# EAGLE board untitled (EAGLE 8.6.3)
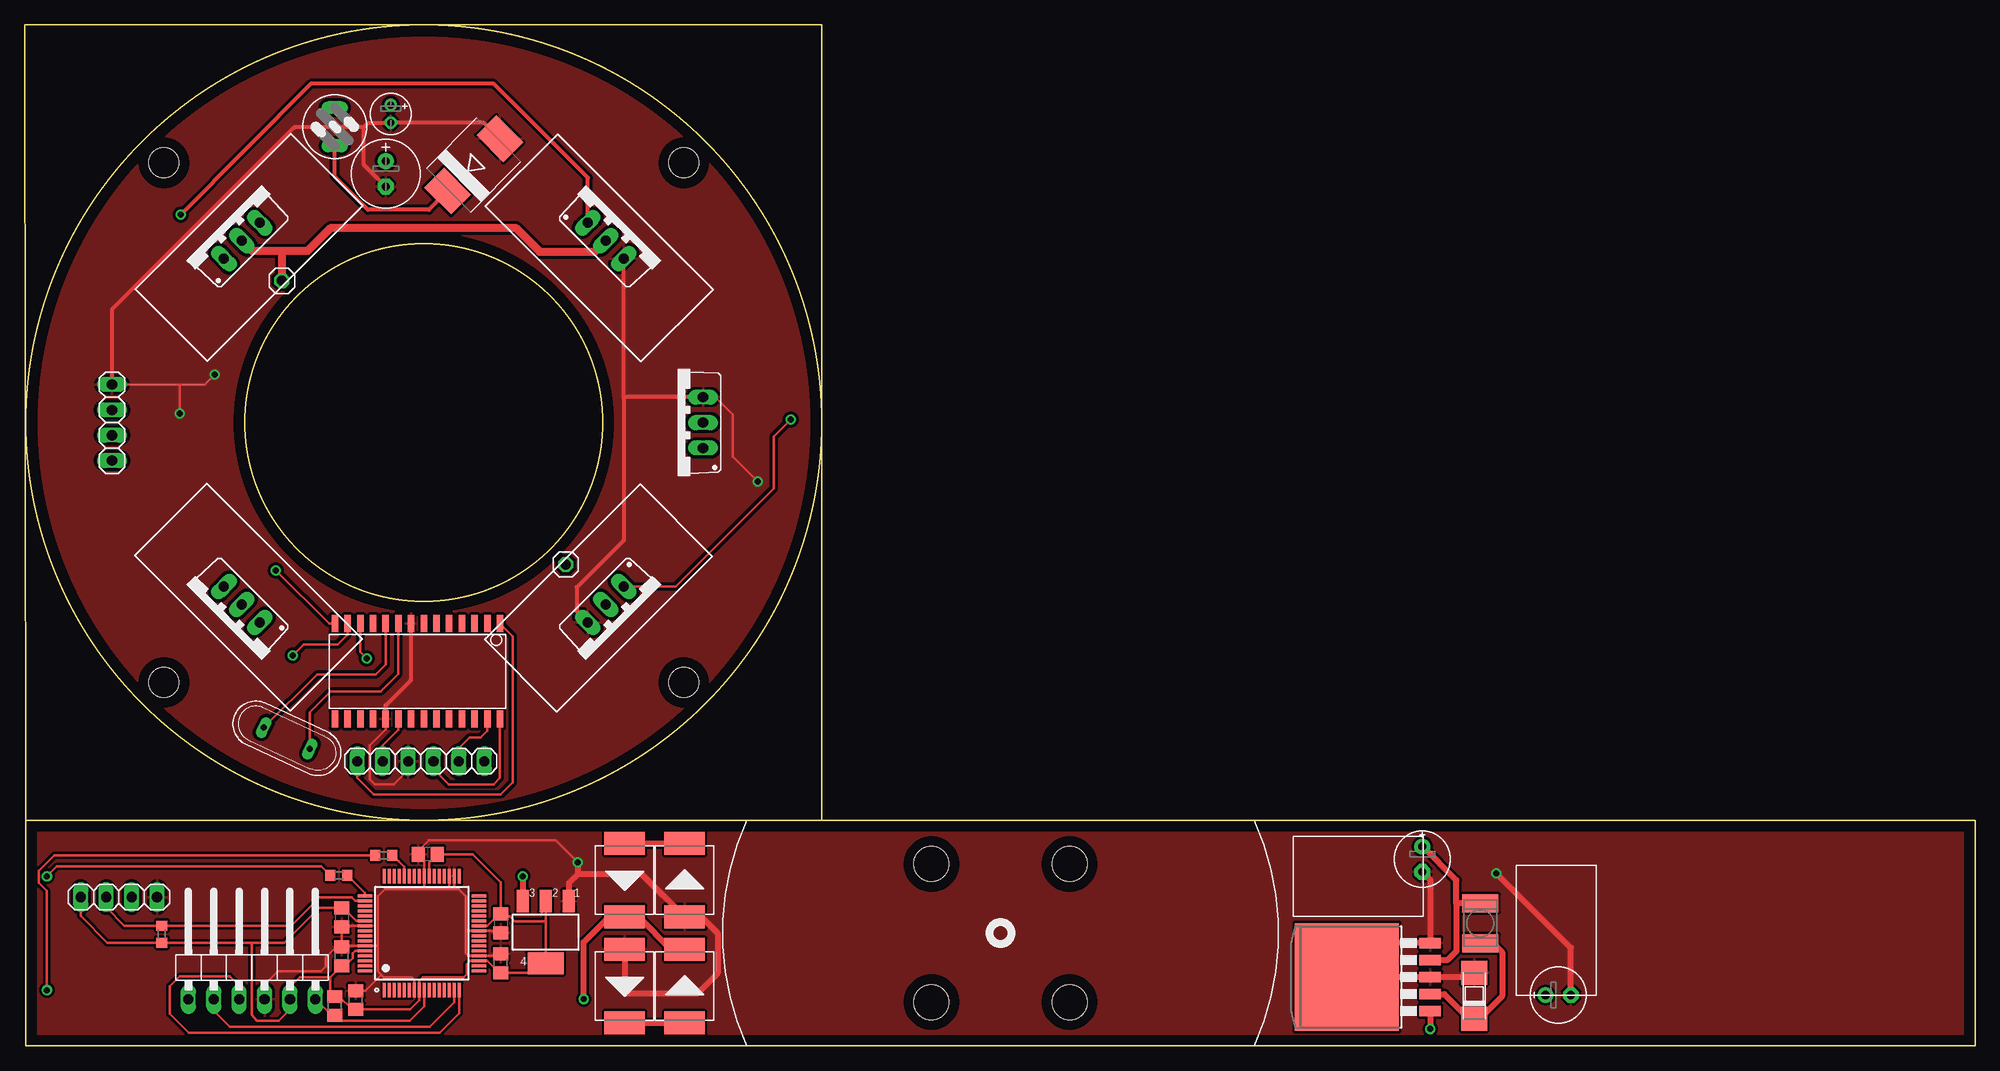
[diagram p0: board, top side]
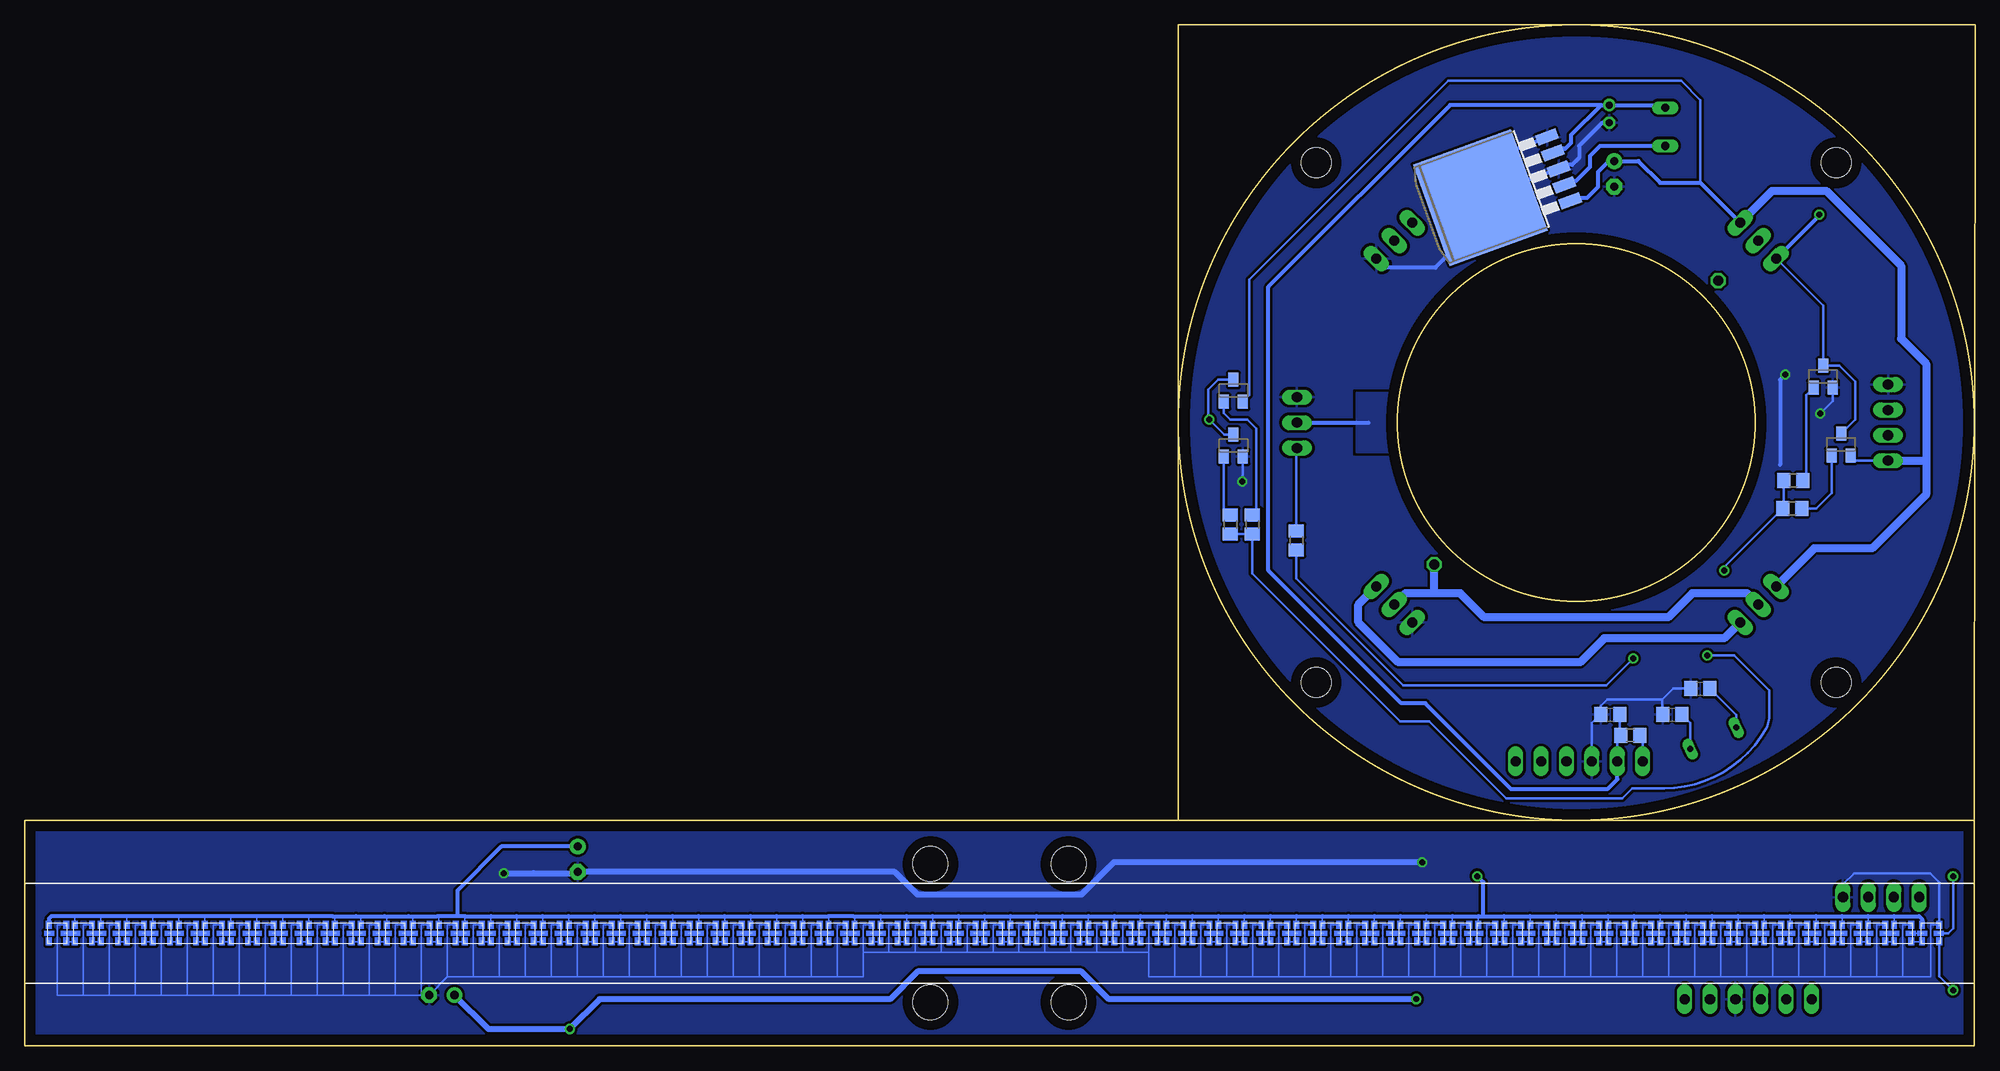
[diagram p1: board, bottom side, seen from below]

Size 195.1 x 102.2 mm. Coordinates in mm from the lower left corner, seen from the top.
Outline: 0.1,22.6 79.7,22.6
Outline: 79.7,22.6 195.1,22.6 195.1,0 0.1,0 0.1,22.6
Outline: 0.1,22.6 0,102.2 79.7,102.2 79.7,22.6
Outline: circle at 39.9,62.4 radius 17.9
Outline: circle at 39.9,62.4 radius 39.79
Copper layers (1*16): Top 0.035mm / dielectric 1.5mm / Bottom 0.035mm
Design rules "default": minimum track width 6mil, minimum drill 0.35mm, track to track 6mil, track to pad 6mil, pad to pad 6mil, via to via 6mil, smd to smd 6mil, copper to edge 40mil, drill to drill 6mil, minimum pad ring 10mil, minimum via ring 8mil, stop-mask expansion 4mil, vias tented up to drill 0mil, thermal gap 10mil
Holes 3.51 mm at 104.51,18.21 90.69,4.39 104.51,4.39 90.69,18.21
Holes 3 mm at 65.9,88.4 13.9,88.4 13.9,36.4 65.9,36.4
Holes 35.8 mm at 39.9,62.4

## Footprints (pad centres in the part's own frame; a part is rotated, then mirrored left to right if it is on the bottom)
E2,5-6E = drill 0.813 pad 1.575: + -1.27,0 | drill 0.813 pad 1.575 octagon: - 1.27,0
C0805 = smd 1.3 x 1.5: 1 -0.95,0; 2 0.95,0
E2,5-7 = drill 0.813 pad 1.6: + -1.27,0 | drill 0.813 pad 1.6 octagon: - 1.27,0
E1,8-4 = drill 0.711 pad 1.168: + -0.889,0 | drill 0.711 pad 1.168 octagon: - 0.889,0
SOD106A = smd 2.4 x 2.6: A 2.3,0; K -2.3,0
DO-214AB = smd 2.286 x 4.064: 1 -3.683,0; 2 3.683,0
DIODE_SMC = smd 2.8 x 3.8: A 3.7,0; C -3.7,0
TO263-5 = smd 1.067 x 2.159: 1 -3.404,-5.791; 2 -1.702,-5.791; 3 0,-5.791; 4 1.702,-5.791; 5 3.404,-5.791 | smd 10.8 x 10.41: 6 0,2.54
SOT223 = smd 1.219 x 2.235: 1 -2.311,-3.099; 2 0,-3.099; 3 2.311,-3.099 | smd 3.6 x 2.2: 4 0,3.099
SO28W = smd 0.65 x 1.7: 1 -7.62,-4.78; 2 -6.35,-4.78; 3 -5.08,-4.78; 4 -3.81,-4.78; 5 -2.54,-4.78; 6 -1.27,-4.78; 7 0,-4.78; 8 1.27,-4.78; 9 2.54,-4.78; 10 3.81,-4.78; 11 5.08,-4.78; 12 6.35,-4.78; 13 7.62,-4.78; 14 8.89,-4.78; 15 8.89,4.78; 16 7.62,4.78; 17 6.35,4.78; 18 5.08,4.78; 19 3.81,4.78; 20 2.54,4.78; 21 1.27,4.78; 22 0,4.78; 23 -1.27,4.78; 24 -2.54,4.78; 25 -3.81,4.78; 26 -5.08,4.78; 27 -6.35,4.78; 28 -7.62,4.78
1X06/90 = drill 1.016 long: 1 -6.35,-3.81; 2 -3.81,-3.81; 3 -1.27,-3.81; 4 1.27,-3.81; 5 3.81,-3.81; 6 6.35,-3.81
1X04 = drill 1.016 long: 1 -3.81,0; 2 -1.27,0; 3 1.27,0; 4 3.81,0
1X06 = drill 1.016 long: 1 -6.35,0; 2 -3.81,0; 3 -1.27,0; 4 1.27,0; 5 3.81,0; 6 6.35,0
1X01 = drill 1.016 octagon: 1 0,0
82114R = drill 0.813 long: 1 0,1.905; 2 0,-1.905
L4532P = smd 1.8 x 3.6: 1 -2,0; 2 2,0
SOT23 = smd 1 x 1.4: 1 -0.95,-1.1; 2 0.95,-1.1; 3 0,1.1
TO220BV = drill 1.016 long: D 0,-2.54; G -2.54,-2.54; S 2.54,-2.54
QS = drill 0.61 long: 1 -2.54,0; 2 2.54,0
R0805 = smd 1.3 x 1.5: 1 -0.95,0; 2 0.95,0
R0603 = smd 1 x 1.1: 1 -0.85,0; 2 0.85,0
TO220BV' = drill 1.016 long: 1 -2.54,-2.54; 2 0,-2.54; 3 2.54,-2.54
QFP50P1200X1200X120-64N = smd 1.45 x 0.3: 1 -5.7,3.75; 2 -5.7,3.25; 3 -5.7,2.75; 4 -5.7,2.25; 5 -5.7,1.75; 6 -5.7,1.25; 7 -5.7,0.75; 8 -5.7,0.25; 9 -5.7,-0.25; 10 -5.7,-0.75; 11 -5.7,-1.25; 12 -5.7,-1.75; 13 -5.7,-2.25; 14 -5.7,-2.75; 15 -5.7,-3.25; 16 -5.7,-3.75; 33 5.7,-3.75; 34 5.7,-3.25; 35 5.7,-2.75; 36 5.7,-2.25; 37 5.7,-1.75; 38 5.7,-1.25; 39 5.7,-0.75; 40 5.7,-0.25; 41 5.7,0.25; 42 5.7,0.75; 43 5.7,1.25; 44 5.7,1.75; 45 5.7,2.25; 46 5.7,2.75; 47 5.7,3.25; 48 5.7,3.75 | smd 0.3 x 1.45: 17 -3.75,-5.7; 18 -3.25,-5.7; 19 -2.75,-5.7; 20 -2.25,-5.7; 21 -1.75,-5.7; 22 -1.25,-5.7; 23 -0.75,-5.7; 24 -0.25,-5.7; 25 0.25,-5.7; 26 0.75,-5.7; 27 1.25,-5.7; 28 1.75,-5.7; 29 2.25,-5.7; 30 2.75,-5.7; 31 3.25,-5.7; 32 3.75,-5.7; 49 3.75,5.7; 50 3.25,5.7; 51 2.75,5.7; 52 2.25,5.7; 53 1.75,5.7; 54 1.25,5.7; 55 0.75,5.7; 56 0.25,5.7; 57 -0.25,5.7; 58 -0.75,5.7; 59 -1.25,5.7; 60 -1.75,5.7; 61 -2.25,5.7; 62 -2.75,5.7; 63 -3.25,5.7; 64 -3.75,5.7
2020LED = smd 0.305 x 0.152: CLKI -0.85,0; CLKO 0.85,0 | smd 0.152 x 0.305: GND -0.85,-0.85; SDI -0.85,0.85; SDO 0.85,0.85; VCC 0.85,-0.85

## Placement (x,y rotation side)
C1  [E2,5-6E]  139.8,18.7 270 top
C2  [C0805]  40.3,19.2 180 top
C3  [E2,5-6E]  153.4,5.1 0 top
C4  [C0805]  31.7,12.9 270 top
C5  [C0805]  47.6,12.3 270 top
C6  [C0805]  33.1,4.6 90 top
C7  [C0805]  47.6,8.3 90 top
C8  [C0805]  31.7,9 90 top
C9  [C0805]  36.5,33.2 0 bottom
C10  [C0805]  27.5,35.8 0 bottom
C11  [C0805]  30.3,33.2 0 bottom
C12  [E2,5-7]  36.1,87.3 270 top
C13  [E1,8-4]  36.6,93.3 270 top
D1  [SOD106A]  144.99,5.04 90 top
D2  SMD-DIODE-SCHOTTKY-40V-3A(DO-214AB)  [DO-214AB]  66,6 90 top
D3  SMD-DIODE-SCHOTTKY-40V-3A(DO-214AB)  [DO-214AB]  60,16.6 270 top
D4  SMD-DIODE-SCHOTTKY-40V-3A(DO-214AB)  [DO-214AB]  66,16.6 90 top
D5  SMD-DIODE-SCHOTTKY-40V-3A(DO-214AB)  [DO-214AB]  60,6 270 top
D6  [DIODE_SMC]  44.9,88.2 45 top
IC1  LM2576S  [TO263-5]  134.8,6.9 90 top
IC2  [SOT223]  52.1,11.4 180 top
IC3  PIC16F876SO  [SO28W]  39.9,37.5 180 top
IC4  LM2576S  [TO263-5]  47.1,85.8 110 bottom
JP1  [1X06/90]  22.7,8.5 0 top
JP2  [1X04]  9.4,14.9 0 top
JP3  [1X04]  8.7,62.4 90 top
JP4  [1X06]  39.6,28.5 0 top
JP5  [1X01]  25.7,76.6 0 top
JP6  [1X01]  54.1,48.2 0 top
L1  82114R  [82114R]  31,92 180 top
L2  [L4532P]  145.6,12.3 90 top
Q1  [SOT23]  15.2,67 0 bottom
Q2  [SOT23]  74.2,60.1 0 bottom
Q3  [SOT23]  13.4,60.2 0 bottom
Q4  [SOT23]  74.2,65.6 0 bottom
Q5  IRF540  [TO220BV]  59.9,82.4 315 top
Q6  IRF540  [TO220BV]  59.9,42.4 225 top
Q7  [TO220BV]  19.9,82.4 45 top
Q8  [QS]  26.2,30.8 335 top
Q9  [TO220BV]  19.9,42.4 135 top
R1  [R0805]  31,4 270 top
R2  [R0603]  13.7,11.2 90 top
R3  [R0805]  18.2,56.6 0 bottom
R4  [R0603]  35.9,19.1 180 top
R5  [R0603]  31.4,17.1 180 top
R6  [R0805]  18.3,53.8 0 bottom
R7  [R0805]  72.3,52.2 90 bottom
R8  [R0805]  74.5,52.2 90 bottom
R9  [R0805]  34.5,31.1 180 bottom
R10  [R0805]  67.9,50.6 90 bottom
T2  2SC1306  [TO220BV']  65.3,62.4 90 top
U1  PIC32MZ2048EFH064-I/PT  [QFP50P1200X1200X120-64N]  39.7,11.3 90 top
U$1  2020LED  [2020LED]  7.25,11.3 180 bottom
U$2  2020LED  [2020LED]  4.45,11.3 180 bottom
U$3  2020LED  [2020LED]  9.85,11.3 180 bottom
U$4  2020LED  [2020LED]  12.45,11.3 180 bottom
U$5  2020LED  [2020LED]  15.05,11.3 180 bottom
U$6  2020LED  [2020LED]  17.65,11.3 180 bottom
U$7  2020LED  [2020LED]  20.25,11.3 180 bottom
U$8  2020LED  [2020LED]  22.85,11.3 180 bottom
U$9  2020LED  [2020LED]  25.45,11.3 180 bottom
U$10  2020LED  [2020LED]  28.05,11.3 180 bottom
U$11  2020LED  [2020LED]  30.65,11.3 180 bottom
U$12  2020LED  [2020LED]  33.25,11.3 180 bottom
U$13  2020LED  [2020LED]  35.85,11.3 180 bottom
U$14  2020LED  [2020LED]  38.45,11.3 180 bottom
U$15  2020LED  [2020LED]  41.05,11.3 180 bottom
U$16  2020LED  [2020LED]  43.65,11.3 180 bottom
U$17  2020LED  [2020LED]  46.25,11.3 180 bottom
U$18  2020LED  [2020LED]  48.85,11.3 180 bottom
U$19  2020LED  [2020LED]  51.45,11.3 180 bottom
U$20  2020LED  [2020LED]  54.05,11.3 180 bottom
U$21  2020LED  [2020LED]  56.65,11.3 180 bottom
U$22  2020LED  [2020LED]  59.25,11.3 180 bottom
U$23  2020LED  [2020LED]  61.85,11.3 180 bottom
U$24  2020LED  [2020LED]  64.45,11.3 180 bottom
U$25  2020LED  [2020LED]  67.05,11.3 180 bottom
U$26  2020LED  [2020LED]  69.65,11.3 180 bottom
U$27  2020LED  [2020LED]  72.25,11.3 180 bottom
U$28  2020LED  [2020LED]  74.85,11.3 180 bottom
U$29  2020LED  [2020LED]  77.45,11.3 180 bottom
U$30  2020LED  [2020LED]  80.05,11.3 180 bottom
U$31  2020LED  [2020LED]  82.65,11.3 180 bottom
U$32  2020LED  [2020LED]  85.25,11.3 180 bottom
U$33  2020LED  [2020LED]  87.85,11.3 180 bottom
U$34  2020LED  [2020LED]  90.45,11.3 180 bottom
U$35  2020LED  [2020LED]  93.05,11.3 180 bottom
U$36  2020LED  [2020LED]  95.65,11.3 180 bottom
U$37  2020LED  [2020LED]  98.25,11.3 180 bottom
U$38  2020LED  [2020LED]  100.85,11.3 180 bottom
U$39  2020LED  [2020LED]  103.45,11.3 180 bottom
U$40  2020LED  [2020LED]  106.05,11.3 180 bottom
U$41  2020LED  [2020LED]  108.65,11.3 180 bottom
U$42  2020LED  [2020LED]  111.25,11.3 180 bottom
U$43  2020LED  [2020LED]  113.85,11.3 180 bottom
U$44  2020LED  [2020LED]  116.45,11.3 180 bottom
U$45  2020LED  [2020LED]  119.05,11.3 180 bottom
U$46  2020LED  [2020LED]  121.65,11.3 180 bottom
U$47  2020LED  [2020LED]  124.25,11.3 180 bottom
U$48  2020LED  [2020LED]  126.85,11.3 180 bottom
U$49  2020LED  [2020LED]  129.45,11.3 180 bottom
U$50  2020LED  [2020LED]  132.05,11.3 180 bottom
U$51  2020LED  [2020LED]  134.65,11.3 180 bottom
U$52  2020LED  [2020LED]  137.25,11.3 180 bottom
U$53  2020LED  [2020LED]  139.85,11.3 180 bottom
U$54  2020LED  [2020LED]  142.45,11.3 180 bottom
U$55  2020LED  [2020LED]  145.05,11.3 180 bottom
U$56  2020LED  [2020LED]  147.65,11.3 180 bottom
U$57  2020LED  [2020LED]  150.25,11.3 180 bottom
U$58  2020LED  [2020LED]  152.85,11.3 180 bottom
U$59  2020LED  [2020LED]  155.45,11.3 180 bottom
U$60  2020LED  [2020LED]  158.05,11.3 180 bottom
U$61  2020LED  [2020LED]  160.65,11.3 180 bottom
U$62  2020LED  [2020LED]  163.25,11.3 180 bottom
U$63  2020LED  [2020LED]  165.85,11.3 180 bottom
U$64  2020LED  [2020LED]  168.45,11.3 180 bottom
U$65  2020LED  [2020LED]  171.05,11.3 180 bottom
U$66  2020LED  [2020LED]  173.65,11.3 180 bottom
U$67  2020LED  [2020LED]  176.25,11.3 180 bottom
U$68  2020LED  [2020LED]  178.85,11.3 180 bottom
U$69  2020LED  [2020LED]  181.45,11.3 180 bottom
U$70  2020LED  [2020LED]  184.05,11.3 180 bottom
U$71  2020LED  [2020LED]  186.65,11.3 180 bottom
U$72  2020LED  [2020LED]  189.25,11.3 180 bottom
U$73  2020LED  [2020LED]  191.85,11.3 180 bottom

## Library data of the parts
C1-C11 L2 R1-R10 = resistor
C12 C13 = rcl; SPICEPREFIX: C
D1 = telefunken; MPN: BYS10/45; OC_FARNELL: 9549188; OC_NEWARK: 96K7236
D2-D5 = SMD-DIODE-SCHOTTKY-40V-3A_DO-214AB_; AVAILABILITY: Good; DESCRIPTION: Rectifier%2C Schottky%3B DO-214AB%3B 3.0A IF%3B 0.75V%3B 40V%3B 100A IFRM%3B 10000V/us%3B 1000pF; MF: Vishay; MP: SS34-E3/57T; PACKAGE: DO-214 Vishay; PRICE: 0.24 USD
D6 = eagle-ltspice; SPICEMODEL: diode; SPICEPREFIX: D
IC1 IC2 IC4 = lm2576
IC3 = microchip; MF: MICROCHIP; MPN: PIC16F876-20/SO; OC_FARNELL: 9761268; OC_NEWARK: 12C1950
JP1-JP6 = pinhead
L1 = inductors; SPICEPREFIX: L
Q1-Q4 = semicon-smd-ipc
Q5-Q7 Q9 = transistor-power
Q8 = special
T2 = transistor
U1 = PIC32MZ2048EFH064-I_PT; AVAILABILITY: Good; DESCRIPTION: PIC32MZ Series 2 MB Flash 512 kB RAM 200 MHz 32-Bit Microcontroller - TQFP-64; MF: Microchip; MP: PIC32MZ2048EFH064-I/PT; PACKAGE: TQFP-64 Microchip; PRICE: 11.29 USD
U$1-U$73 = APA2020

## Nets
+3V3: C2.1 C4.1 C5.1 C6.1 C7.1 C8.1 IC2.2 JP1.5 JP2.1 R1.1 R2.1 U1.8 U1.19 U1.26 U1.39 U1.54 U1.60
+5V: C1.+ IC1.4 IC2.3 L2.2 U$1.VCC U$2.VCC U$3.VCC U$4.VCC U$5.VCC U$6.VCC U$7.VCC U$8.VCC U$9.VCC U$10.VCC U$11.VCC U$12.VCC U$13.VCC U$14.VCC U$15.VCC U$16.VCC U$17.VCC U$18.VCC U$19.VCC U$20.VCC U$21.VCC U$22.VCC U$23.VCC U$24.VCC U$25.VCC U$26.VCC U$27.VCC U$28.VCC U$29.VCC U$30.VCC U$31.VCC U$32.VCC U$33.VCC U$34.VCC U$35.VCC U$36.VCC U$37.VCC U$38.VCC U$39.VCC U$40.VCC U$41.VCC U$42.VCC U$43.VCC U$44.VCC U$45.VCC U$46.VCC U$47.VCC U$48.VCC U$49.VCC U$50.VCC U$51.VCC U$52.VCC U$53.VCC U$54.VCC U$55.VCC U$56.VCC U$57.VCC U$58.VCC U$59.VCC U$60.VCC U$61.VCC U$62.VCC U$63.VCC U$64.VCC U$65.VCC U$66.VCC U$67.VCC U$68.VCC U$69.VCC U$70.VCC U$71.VCC U$72.VCC U$73.VCC
+5V1: C9.2 C13.+ IC3.20 IC4.4 JP4.2 L1.2 R9.2
+12V: C12.+ IC4.1 JP3.1 Q3.2 Q4.2 Q7.S Q9.S
+15V: C3.+ D2.2 D3.2 IC1.1
GND: C1.- C2.2 C3.- C4.2 C5.2 C6.2 C7.2 C8.2 D1.A D4.1 D5.1 IC1.3 IC1.5 IC2.1 JP1.4 JP2.4 U1.7 U1.20 U1.25 U1.34 U1.35 U1.40 U1.55 U1.59 U$1.GND U$2.GND U$3.GND U$4.GND U$5.GND U$6.GND U$7.GND U$8.GND U$9.GND U$10.GND U$11.GND U$12.GND U$13.GND U$14.GND U$15.GND U$16.GND U$17.GND U$18.GND U$19.GND U$20.GND U$21.GND U$22.GND U$23.GND U$24.GND U$25.GND U$26.GND U$27.GND U$28.GND U$29.GND U$30.GND U$31.GND U$32.GND U$33.GND U$34.GND U$35.GND U$36.GND U$37.GND U$38.GND U$39.GND U$40.GND U$41.GND U$42.GND U$43.GND U$44.GND U$45.GND U$46.GND U$47.GND U$48.GND U$49.GND U$50.GND U$51.GND U$52.GND U$53.GND U$54.GND U$55.GND U$56.GND U$57.GND U$58.GND U$59.GND U$60.GND U$61.GND U$62.GND U$63.GND U$64.GND U$65.GND U$66.GND U$67.GND U$68.GND U$69.GND U$70.GND U$71.GND U$72.GND U$73.GND
GND1: C9.1 C10.1 C11.1 C12.- C13.- D6.A IC3.8 IC3.19 IC4.3 IC4.5 JP3.4 JP4.3 Q1.2 Q2.2 Q5.S Q6.S T2.3
N$1: D2.1 D5.2
N$2: D3.1 D4.2
N$3: D1.K IC1.2 L2.1
N$4: Q1.3 Q3.3 Q5.G Q7.G
N$5: JP2.2 R2.2 U1.50
N$6: U$1.SDI U$2.SDO
N$7: U$10.SDO U$11.SDI
N$8: U$10.CLKO U$11.CLKI
N$9: U$1.CLKI U$2.CLKO
N$10: Q2.3 Q4.3 Q6.G Q9.G
N$11: U$11.SDO U$12.SDI
N$12: JP1.3 U1.16
N$13: JP1.2 U1.15
N$14: JP1.6 R1.2 U1.9
N$15: Q3.1 R6.2
N$16: R4.2 U$2.SDI
N$17: U$1.SDO U$3.SDI
N$18: R5.2 U$2.CLKI
N$19: R5.1 U1.49
N$20: U$1.CLKO U$3.CLKI
N$21: R4.1 U1.44
N$22: Q4.1 R7.2
N$23: IC3.14 R3.1 R6.1
N$24: U$11.CLKO U$12.CLKI
N$25: U$12.SDO U$13.SDI
N$26: IC3.13 R7.1 R8.1
N$27: U$12.CLKO U$13.CLKI
N$28: U$13.SDO U$14.SDI
N$29: U$3.SDO U$4.SDI
N$30: U$3.CLKO U$4.CLKI
N$31: U$13.CLKO U$14.CLKI
N$32: U$14.SDO U$15.SDI
N$33: U$14.CLKO U$15.CLKI
N$34: U$4.SDO U$5.SDI
N$35: U$4.CLKO U$5.CLKI
N$36: U$15.SDO U$16.SDI
N$37: U$15.CLKO U$16.CLKI
N$38: U$16.SDO U$17.SDI
N$39: U$16.CLKO U$17.CLKI
N$40: U$5.SDO U$6.SDI
N$41: U$5.CLKO U$6.CLKI
N$42: U$17.SDO U$18.SDI
N$43: U$17.CLKO U$18.CLKI
N$44: U$18.SDO U$19.SDI
N$45: U$18.CLKO U$19.CLKI
N$46: U$6.SDO U$7.SDI
N$47: JP6.1 Q6.D Q9.D
N$48: U$19.SDO U$20.SDI
N$49: U$19.CLKO U$20.CLKI
N$50: JP5.1 Q5.D Q7.D
N$51: U$20.SDO U$21.SDI
N$52: U$20.CLKO U$21.CLKI
N$53: U$21.SDO U$22.SDI
N$54: U$6.CLKO U$7.CLKI
N$55: U$21.CLKO U$22.CLKI
N$56: U$22.SDO U$23.SDI
N$57: U$22.CLKO U$23.CLKI
N$58: U$23.SDO U$24.SDI
N$59: U$23.CLKO U$24.CLKI
N$60: U$7.SDO U$8.SDI
N$61: U$24.SDO U$25.SDI
N$62: U$7.CLKO U$8.CLKI
N$63: U$24.CLKO U$25.CLKI
N$64: U$25.SDO U$26.SDI
N$65: U$25.CLKO U$26.CLKI
N$66: U$8.SDO U$9.SDI
N$67: U$8.CLKO U$9.CLKI
N$68: U$26.SDO U$27.SDI
N$69: U$26.CLKO U$27.CLKI
N$70: U$9.SDO U$10.SDI
N$71: U$9.CLKO U$10.CLKI
N$72: U$27.SDO U$28.SDI
N$73: U$27.CLKO U$28.CLKI
N$74: IC3.1 JP4.1 R9.1
N$75: U$28.SDO U$29.SDI
N$76: U$28.CLKO U$29.CLKI
N$77: U$29.SDO U$30.SDI
N$78: U$29.CLKO U$30.CLKI
N$79: U$30.SDO U$31.SDI
N$80: U$30.CLKO U$31.CLKI
N$81: U$31.SDO U$32.SDI
N$82: U$31.CLKO U$32.CLKI
N$83: U$32.SDO U$33.SDI
N$84: U$32.CLKO U$33.CLKI
N$85: U$33.SDO U$34.SDI
N$86: U$33.CLKO U$34.CLKI
N$87: U$34.SDO U$35.SDI
N$88: U$34.CLKO U$35.CLKI
N$89: U$35.SDO U$36.SDI
N$90: U$35.CLKO U$36.CLKI
N$91: U$36.SDO U$37.SDI
N$92: U$36.CLKO U$37.CLKI
N$93: U$37.SDO U$38.SDI
N$94: U$37.CLKO U$38.CLKI
N$95: IC3.28 JP4.4
N$96: U$38.SDO U$39.SDI
N$97: U$38.CLKO U$39.CLKI
N$98: U$39.SDO U$40.SDI
N$99: U$39.CLKO U$40.CLKI
N$100: U$40.SDO U$41.SDI
N$101: U$40.CLKO U$41.CLKI
N$102: U$41.SDO U$42.SDI
N$103: U$41.CLKO U$42.CLKI
N$104: U$42.SDO U$43.SDI
N$105: U$42.CLKO U$43.CLKI
N$106: U$43.SDO U$44.SDI
N$107: U$43.CLKO U$44.CLKI
N$108: U$44.SDO U$45.SDI
N$109: U$44.CLKO U$45.CLKI
N$110: U$45.SDO U$46.SDI
N$111: U$45.CLKO U$46.CLKI
N$112: IC3.27 JP4.5
N$113: U$46.SDO U$47.SDI
N$114: U$46.CLKO U$47.CLKI
N$115: U$47.SDO U$48.SDI
N$116: U$47.CLKO U$48.CLKI
N$117: U$48.SDO U$49.SDI
N$118: U$48.CLKO U$49.CLKI
N$119: U$49.SDO U$50.SDI
N$120: U$49.CLKO U$50.CLKI
N$121: U$50.SDO U$51.SDI
N$122: U$50.CLKO U$51.CLKI
N$123: U$51.SDO U$52.SDI
N$124: U$51.CLKO U$52.CLKI
N$125: U$52.SDO U$53.SDI
N$126: U$52.CLKO U$53.CLKI
N$127: U$53.SDO U$54.SDI
N$128: U$53.CLKO U$54.CLKI
N$129: U$54.SDO U$55.SDI
N$130: U$54.CLKO U$55.CLKI
N$131: U$55.SDO U$56.SDI
N$132: U$55.CLKO U$56.CLKI
N$133: U$56.SDO U$57.SDI
N$134: U$56.CLKO U$57.CLKI
N$135: U$57.SDO U$58.SDI
N$136: U$57.CLKO U$58.CLKI
N$137: U$58.SDO U$59.SDI
N$138: U$58.CLKO U$59.CLKI
N$139: U$59.SDO U$60.SDI
N$140: U$59.CLKO U$60.CLKI
N$141: U$60.SDO U$61.SDI
N$142: U$60.CLKO U$61.CLKI
N$143: U$61.SDO U$62.SDI
N$144: U$61.CLKO U$62.CLKI
N$145: U$62.SDO U$63.SDI
N$146: U$62.CLKO U$63.CLKI
N$147: U$63.SDO U$64.SDI
N$148: U$63.CLKO U$64.CLKI
N$149: U$64.SDO U$65.SDI
N$150: U$64.CLKO U$65.CLKI
N$151: U$65.SDO U$66.SDI
N$152: U$65.CLKO U$66.CLKI
N$153: U$66.SDO U$67.SDI
N$154: U$66.CLKO U$67.CLKI
N$155: U$67.SDO U$68.SDI
N$156: U$67.CLKO U$68.CLKI
N$157: U$68.SDO U$69.SDI
N$158: U$68.CLKO U$69.CLKI
N$159: U$69.SDO U$70.SDI
N$160: U$69.CLKO U$70.CLKI
N$161: U$70.SDO U$71.SDI
N$162: U$70.CLKO U$71.CLKI
N$163: U$71.SDO U$72.SDI
N$164: U$71.CLKO U$72.CLKI
N$165: U$72.SDO U$73.SDI
N$166: U$72.CLKO U$73.CLKI
N$167: C10.2 IC3.10 Q8.1
N$168: C11.2 IC3.9 Q8.2
N$169: Q1.1 R3.2
N$170: Q2.1 R8.2
N$171: IC3.12 R10.1
N$172: R10.2 T2.1
N$173: D6.C IC4.2 L1.1
N$174: T2.2
VBUS: U1.33

## Tracks (layer width: path | path; a pad name or v marks a point on that pad's centre or on a via)
+3V3
  Top 0.254: U1.39 40.45,18.4 C2.1 44.8,19.2 47.6,16.4 C5.1 | U1.54 33.15,12.55 31.95,13.75 C4.1 29.45,13.85 25.95,10.35 22.7,10.35 | 51.7,13.4 IC2.2 52.1,12.5 | 22.7,10.35 R2.1 8.25,10.35 5.59,13.01 JP2.1 | 52.1,12.5 52.1,8.5 50.95,7.35 C7.1 47.25,7.55 46.25,8.55 U1.19 44.55,8.55 44.2,8.2 44.2,7.2 43.9,6.9 39.8,6.9 39.45,6.55 U1.8 39.45,4.55 38.55,3.65 C6.1 32.75,3.65 31.45,4.95 R1.1 30.55,5.4 30.55,6.9 | U1.60 33.05,9.55 32.8,9.3 32.8,8.8 32.05,8.05 C8.1 30.55,6.9 | C5.1 48.05,13 48.5,13 49,12.5 52.1,12.5 | U1.26 46.25,12.05 47.45,13.25 C5.1 | 30.55,6.9 27.5,6.9 26.51,5.91 JP1.5 26.51,3.61 25.4,2.5 23.2,2.5 22.7,3.1 22.7,10.35
+5V  (via drill 0.6)
  Top 0.61: 143.2,14.2 143.2,16.6 139.83,19.97 C1.+ | 143.2,14.2 143.2,9.5 142.3,8.6 IC1.4 | L2.2 143.3,14.3 143.2,14.2 | v49.8,17 v49.79,16.99 IC2.3
  Bottom 0.152: U$72.VCC 190.1,13 190.3,13 | U$71.VCC 187.5,13 187.75,13 | U$70.VCC 184.9,13 185.05,13 | U$69.VCC 182.3,13 182.55,13 | U$68.VCC 179.7,13 180,13 | U$67.VCC 177.1,13 177.4,13 | U$66.VCC 174.5,13 174.9,13 | U$65.VCC 171.9,13 172.05,13 | U$64.VCC 169.3,13 169.55,13 | U$63.VCC 166.7,13 167.45,13 | U$1.VCC 8.1,13 | U$3.VCC 10.7,13 | U$4.VCC 13.3,13 | U$5.VCC 15.9,13 | U$6.VCC 18.5,13 | U$7.VCC 21.1,13 | U$8.VCC 23.7,13 | U$9.VCC 26.3,13 | U$10.VCC 28.9,13 | U$11.VCC 31.5,13 | U$12.VCC 34.1,13 | U$13.VCC 36.7,13 | U$14.VCC 39.3,13 | U$15.VCC 41.9,13 | U$16.VCC 44.5,13 | U$17.VCC 47.1,13 | U$18.VCC 49.7,13 | U$19.VCC 52.3,13 | U$20.VCC 54.9,13 | U$21.VCC 57.5,13 | U$22.VCC 60.1,13 | U$23.VCC 62.7,13 | U$24.VCC 65.3,13 | U$25.VCC 67.9,13 | U$26.VCC 70.5,13 | U$27.VCC 73.1,13 | U$28.VCC 75.7,13 | U$29.VCC 78.3,13 | U$30.VCC 80.9,13 | U$31.VCC 83.5,13 | U$32.VCC 86.1,13 | U$33.VCC 88.7,13 | U$34.VCC 91.3,13 | U$35.VCC 93.9,13 | U$36.VCC 96.5,13 | U$37.VCC 99.1,13 | U$38.VCC 101.7,13 | U$39.VCC 104.3,13 | U$40.VCC 106.9,13 | U$41.VCC 109.5,13 | U$43.VCC 114.7,13 | U$44.VCC 117.3,13 | U$45.VCC 119.9,13 | U$46.VCC 122.5,13 | U$47.VCC 125.1,13 | U$48.VCC 127.7,13 | U$49.VCC 130.3,13 | U$50.VCC 132.9,13 | U$51.VCC 135.5,13 | U$52.VCC 138.1,13 | U$53.VCC 140.7,13 | U$54.VCC 143.3,13 | U$55.VCC 145.9,13 | U$56.VCC 148.5,13 | U$57.VCC 151.1,13 | U$58.VCC 153.7,13 153.85,13 | U$59.VCC 156.3,13 156.75,13 | U$60.VCC 158.9,13 159.15,13 | U$61.VCC 161.5,13 162,13 | U$62.VCC 164.1,13 164.35,13 | U$42.VCC 112.1,13 112.25,13
  Bottom 0.406: 49.2,13 49.7,13 52.3,13 54.9,13 57.5,13 60.1,13 62.7,13 65.3,13 67.9,13 70.5,13 73.1,13 75.7,13 78.3,13 80.9,13 83.5,13 86.1,13 88.7,13 91.3,13 93.9,13 96.5,13 99.1,13 101.7,13 104.3,13 106.9,13 109.5,13 112.25,13 114.7,13 117.3,13 119.9,13 122.5,13 125.1,13 127.7,13 130.3,13 132.9,13 135.5,13 138.1,13 140.7,13 143.3,13 145.9,13 148.5,13 151.1,13 151.85,13 | 49.2,13 47.1,13 44.5,13 41.9,13 39.3,13 36.7,13 34.1,13 31.5,13 28.9,13 26.3,13 23.7,13 21.1,13 18.5,13 15.9,13 13.3,13 10.7,13 8.1,13 5.6,13 5.3,12.7 U$2.VCC | 151.85,13 153.85,13 156.75,13 159.15,13 162,13 164.35,13 167.45,13 169.55,13 172.05,13 174.9,13 177.4,13 180,13 182.55,13 185.05,13 187.75,13 190.3,13 192.45,13 192.7,12.75 U$73.VCC | C1.+ 147.43,19.97 151.85,15.55 151.85,13 | 49.2,13 49.2,16.4 v49.8,17
+5V1
  Top 0.254: JP4.2 35.79,30.09 37.36,31.66 IC3.20
  Bottom 0.254: C9.2 35.55,31.2 R9.2 35.79,30.76 35.79,28.7 JP4.2
  Bottom 0.406: IC4.4 42.02,89.38 41.6,89.8 41,89.8 40.4,90.4 40.4,91.2 37.41,94.19 | 37.41,94.19 C13.+ 31.28,94.19 L1.2 | 37.41,94.19 52.51,94.19 70.7,76 70.7,47.6 57.4,34.3 55,34.3 46.4,25.7 36.8,25.7 35.79,26.71 35.79,28.7
+12V
  Bottom 0.254: Q3.2 11.94,58.59 JP3.1 | Q4.2 72.6,65.15 72.6,76.7 52.7,96.6 29.4,96.6 27.49,94.69 27.49,86.4
  Bottom 0.406: IC4.1 40.09,84.58 39.77,84.9 38.8,84.9 37.7,86 37.7,87.5 36.63,88.57 C12.+ 33.67,88.57 31.5,86.4 27.49,86.4 Q7.S
  Bottom 0.813: Q7.S 20.29,85.6 14.9,85.6 7.4,78.1 7.4,70.8 4.9,68.3 4.9,58.6 | 4.9,58.6 4.9,55.2 10.3,49.8 16.09,49.8 Q9.S | JP3.1 4.91,58.59 4.9,58.6
+15V  (via drill 0.6)
  Top 0.61: D2.2 65.32,8.98 60.68,13.62 D3.2 59.58,12.8 58.3,12.8 55.9,10.4 v55.9,4.7 | IC1.1 v140.59,1.71 v140.6,1.7
  Bottom 0.61: C3.+ 148.73,1.7 v140.6,1.7 137.6,4.7 108.55,4.7 105.79,7.46 89.41,7.46 86.65,4.7 v55.9,4.7
GND  (via drill 0.6)
  Top 0.254: C7.2 47.4,9.05 U1.20 44.35,9.05 44.1,9.3 44.1,11.6 | C8.2 31.77,10.31 32.2,10.05 U1.59 35.3,10.05 | U1.55 31.9,12.05 C4.2 C8.2 | v55.3,18.4 53.1,20.6 40.4,20.6 39.35,19.55 C2.2 39.95,18.6 U1.40 39.95,15.75 arc-90 39.9,15.7 | 35.3,10.05 35.3,15 36,15.7 39.9,15.7 | 42.5,15.7 39.9,15.7 | 42.5,15.7 43,15.7 | 43,15.7 43.4,15.7 44.1,15 44.1,11.6 | 44.1,11.6 arc90 44.15,11.55 U1.25 47.4,11.55 C5.2 | U1.34 42.95,15.75 arc90 43,15.7 | U1.35 42.45,15.75 arc90 42.5,15.7 | 35.3,10.05 35.3,7.5 35.65,7.15 | U1.7 38.95,6.65 38.7,6.9 35.9,6.9 35.65,7.15 | JP1.4 23.97,6.17 25.3,7.5 29.6,7.5 30.1,8 30.1,8.9 31.15,9.95 C8.2 | C6.2 34.05,5.55 35.65,7.15
  Top 0.61: D5.1 60,5.3 67.3,5.3 69.3,7.3 69.3,11.3 67.7,12.9 66.72,12.9 D4.1 61.72,17.2 55.3,17.2 | C1.- 140.59,16.64 IC1.5 134.8,10.3 134.8,6.9 IC1.3 144.55,6.9 D1.A | v55.3,18.4 55.3,17.2 | 55.3,17.2 54.41,16.31 IC2.1 | C3.- 154.67,9.83 v147.2,17.3
  Bottom 0.152: 144.2,17.35 144.2,17.3 | 55.15,18.4 v55.3,18.4 | U$73.GND 191.85,12.15 191.85,5.1 189.25,5.1 | 186.65,5.1 189.25,5.1 | 184.05,5.1 186.65,5.1 | 181.45,5.1 184.05,5.1 | 178.85,5.1 181.45,5.1 | 176.25,5.1 178.85,5.1 | 173.65,5.1 176.25,5.1 | 171.05,5.1 168.45,5.1 | 171.05,5.1 173.65,5.1 | 165.85,5.1 168.45,5.1 | 163.25,5.1 165.85,5.1 | 160.65,5.1 163.25,5.1 | 158.05,5.1 160.65,5.1 | 155.45,5.1 158.05,5.1 | 155.45,5.1 C3.- 152.85,6.92 | U$72.GND 189.25,12.15 189.25,5.1 | U$71.GND 186.65,12.15 186.65,5.1 | U$70.GND 184.05,12.15 184.05,5.1 | U$69.GND 181.45,12.15 181.45,5.1 | U$68.GND 178.85,12.15 178.85,5.1 | U$67.GND 176.25,12.15 176.25,5.1 | U$66.GND 173.65,12.15 173.65,5.1 | U$64.GND 168.45,12.15 168.45,5.1 | U$63.GND 165.85,12.15 165.85,5.1 | U$62.GND 163.25,12.15 163.25,5.1 | U$61.GND 160.65,12.15 160.65,5.1 | U$60.GND 158.05,12.15 158.05,5.1 | U$59.GND 155.45,12.15 155.45,5.1 | U$58.GND 152.85,12.15 152.85,6.92 | U$57.GND 150.25,12.15 150.25,6.92 | 150.25,6.92 152.85,6.92 | U$56.GND 147.65,12.15 147.65,6.92 | 147.65,6.92 150.25,6.92 | U$55.GND 145.05,12.15 145.05,6.92 | 145.05,6.92 147.65,6.92 | U$54.GND 142.45,12.15 142.45,6.92 | 142.45,6.92 145.05,6.92 | U$53.GND 139.85,12.15 139.85,6.92 | 139.85,6.92 142.45,6.92 | U$52.GND 137.25,12.15 137.25,6.92 | 137.25,6.92 139.85,6.92 | U$51.GND 134.65,12.15 134.65,6.92 | 134.65,6.92 137.25,6.92 | U$50.GND 132.05,12.15 132.05,6.92 | 132.05,6.92 134.65,6.92 | U$49.GND 129.45,12.15 129.45,6.92 | 129.45,6.92 132.05,6.92 | U$48.GND 126.85,12.15 126.85,6.92 | 126.85,6.92 129.45,6.92 | U$47.GND 124.25,12.15 124.25,6.92 | 124.25,6.92 126.85,6.92 | U$46.GND 121.65,12.15 121.65,6.92 | 121.65,6.92 124.25,6.92
  Bottom 0.152: U$45.GND 119.05,12.15 119.05,6.92 | 119.05,6.92 121.65,6.92 | U$44.GND 116.45,12.15 116.45,6.92 | 116.45,6.92 119.05,6.92 | U$43.GND 113.85,12.15 113.85,6.92 | 113.85,6.92 116.45,6.92 | U$42.GND 111.25,12.15 111.25,9.4 | 113.85,6.92 111.25,6.92 111.25,9.4 | U$40.GND 106.05,12.15 106.05,9.4 | U$39.GND 103.45,12.15 103.45,9.4 | U$38.GND 100.85,12.15 100.85,9.4 | U$37.GND 98.25,12.15 98.25,9.4 | U$36.GND 95.65,12.15 95.65,9.4 | U$35.GND 93.05,12.15 93.05,9.4 | U$34.GND 90.45,12.15 90.45,9.4 | U$33.GND 87.85,12.15 87.85,9.4 | U$32.GND 85.25,12.15 85.25,9.4 | U$31.GND 82.65,12.15 82.65,9.4 | 82.65,9.4 82.65,6.92 80.05,6.92 | U$30.GND 80.05,12.15 80.05,6.92 | U$29.GND 77.45,12.15 77.45,6.92 | 77.45,6.92 80.05,6.92 | U$28.GND 74.85,12.15 74.85,6.92 | 74.85,6.92 77.45,6.92 | U$27.GND 72.25,12.15 72.25,6.92 | 72.25,6.92 74.85,6.92 | U$26.GND 69.65,12.15 69.65,6.92 | 69.65,6.92 72.25,6.92 | U$25.GND 67.05,12.15 67.05,6.92 | 67.05,6.92 69.65,6.92 | U$24.GND 64.45,12.15 64.45,6.92 | 64.45,6.92 67.05,6.92 | U$23.GND 61.85,12.15 61.85,6.92 | 61.85,6.92 64.45,6.92 | U$22.GND 59.25,12.15 59.25,6.92 | 59.25,6.92 61.85,6.92 | U$21.GND 56.65,12.15 56.65,6.92 | 56.65,6.92 59.25,6.92 | U$20.GND 54.05,12.15 54.05,6.92 | 54.05,6.92 56.65,6.92 | U$19.GND 51.45,12.15 51.45,6.92 | 51.45,6.92 54.05,6.92 | U$18.GND 48.85,12.15 48.85,6.92 | 48.85,6.92 51.45,6.92 | U$17.GND 46.25,12.15 46.25,6.92 | 46.25,6.92 48.85,6.92 | U$16.GND 43.65,12.15 43.65,6.92 | 43.65,6.92 46.25,6.92 | U$15.GND 41.05,12.15 41.05,6.92 | 41.05,6.92 43.65,6.92 | U$14.GND 38.45,12.15 38.45,6.92 | 38.45,6.92 41.05,6.92 | U$13.GND 35.85,12.15 35.85,6.92 | 35.85,6.92 38.45,6.92 | U$12.GND 33.25,12.15 33.25,6.92
  Bottom 0.152: 33.25,6.92 35.85,6.92 | U$11.GND 30.65,12.15 30.65,6.92 | 30.65,6.92 33.25,6.92 | U$10.GND 28.05,12.15 28.05,6.92 | 28.05,6.92 30.65,6.92 | U$9.GND 25.45,12.15 25.45,6.92 | 25.45,6.92 28.05,6.92 | U$8.GND 22.85,12.15 22.85,6.92 | 22.85,6.92 25.45,6.92 | U$7.GND 20.25,12.15 20.25,6.92 | 20.25,6.92 22.85,6.92 | U$6.GND 17.65,12.15 17.65,6.92 | 17.65,6.92 20.25,6.92 | U$5.GND 15.05,12.15 15.05,6.92 | 15.05,6.92 17.65,6.92 | U$4.GND 12.45,12.15 12.45,6.92 | 12.45,6.92 15.05,6.92 | U$3.GND 9.85,12.15 9.85,6.92 | 9.85,6.92 12.45,6.92 | U$1.GND 7.25,12.15 7.25,6.92 | 7.25,6.92 9.85,6.92 | U$2.GND 4.45,12.15 4.45,6.92 7.25,6.92 | U$65.GND 171.05,12.15 171.05,5.1 | 82.65,9.4 85.25,9.4 | 85.25,9.4 87.85,9.4 | 87.85,9.4 90.45,9.4 | 90.45,9.4 93.05,9.4 | 93.05,9.4 95.65,9.4 | 95.65,9.4 98.25,9.4 | 98.25,9.4 100.85,9.4 | 103.45,9.4 106.05,9.4 | 106.05,9.4 108.7,9.4 | 108.7,9.4 111.25,9.4 | 108.7,9.4 108.7,12.15 U$41.GND | 100.85,9.4 103.45,9.4
  Bottom 0.254: U$2.GND 3.6,16.4 4.5,17.3 12.1,17.3 13.21,16.19 JP2.4
  Bottom 0.61: 140.03,17.2 C1.- | v147.2,17.3 144.2,17.3 139.93,17.3 C1.- | v55.3,18.4 86.15,18.4 89.41,15.14 105.79,15.14 108.08,17.43 C1.-
  pour Bottom (isolate 0.254): 0.1,0 195.1,0 195.1,22.6 0.1,22.6
  pour Top (isolate 0.254): 0.1,0 195.1,0 195.1,22.6 0.1,22.6
GND1  (via drill 0.6)
  Top 0.254: IC3.19 36.09,31.69 34.5,30.1 34.5,26.7 35,26.2 36.9,26.2 38.33,27.63 JP4.3 | v73.3,56.5 70.8,59 70.8,63.2 69.06,64.94 T2.3 | JP3.4 15.5,66.21 | 15.5,66.21 18.01,66.21 v19,67.2 | 15.5,66.21 v15.5,63.3
  Top 0.406: D6.A 45.92,92.41 C13.- 34.36,92.41 33.9,91.95 | IC3.19 36.09,34.09 38.63,36.63 IC3.8 | C12.- 33.9,88.23 33.9,91.95 | JP3.4 8.7,73.7 26.95,91.95 33.9,91.95 | T2.3 59.9,64.94 | 59.9,64.94 Q5.S | Q6.S 55.2,43.51 55.2,45.9 59.9,50.6 59.9,64.94
  Bottom 0.254: C10.1 30.2,35.8 31.3,34.7 | 31.3,34.7 31.3,33.25 C11.1 | JP4.3 38.33,32.32 C9.1 37.45,34.05 36.8,34.7 31.3,34.7 | Q1.2 14.25,64.55 v15.5,63.3 | Q2.2 73.25,56.55 v73.3,56.5
  Bottom 0.406: 45.5,86.4 IC4.3 41.24,88.2 40.3,88.2 39.6,88.9 39.6,90.1 37.29,92.41 C13.- | 45.5,86.4 46.7,89.5 IC4.5 | 45.5,86.4 54,77.9 58.99,77.9 Q5.S | v19,67.2 19.5,66.7 19.5,58.2
  pour Bottom: 21.9,65.4 17.9,65.4 17.9,59.4 21.9,59.4
  pour Bottom (isolate 0.254, rank 3): 39.8,22.6 arc-90 0.1,62.3 0.1,62.4 arc-90 39.9,102.2 40,102.2 arc-90 79.7,62.5 79.7,62.4 arc-90
  pour Top (isolate 0.305): 39.9,22.6 arc-90 0.1,62.3 arc-90 40,102.2 40.1,102.2 arc-90 79.7,62.6 79.7,62.4 arc-90
N$1
  Top 0.61: D5.2 D2.1
N$2
  Top 0.61: D3.1 D4.2
N$3
  Top 0.61: IC1.2 142,5.2 144.46,2.74 D1.K 145.54,2.74 147.8,5 147.8,9.4 146.72,10.48 146.54,10.3 L2.1
N$4  (via drill 0.6)
  Top 0.406: Q5.G 56.31,86.89 46.9,96.3 28.6,96.3 v15.6,83.2
  Bottom 0.254: Q7.G 15.2,74.11 Q1.3 13.6,68.1 12,66.5 12,62.7 Q3.3
  Bottom 0.406: Q7.G 15.6,83.11 v15.6,83.2
N$5
  Top 0.254: U1.50 33.05,14.55 32.7,14.9 29.5,14.9 26.65,12.05 R2.2 9.95,12.05 8.13,13.87 JP2.2
N$6
  Bottom 0.152: U$2.SDO U$1.SDI
N$7
  Bottom 0.152: U$10.SDO U$11.SDI
N$8
  Bottom 0.152: U$10.CLKO U$11.CLKI
N$9
  Bottom 0.152: U$2.CLKO U$1.CLKI
N$10  (via drill 0.6)
  Top 0.254: v76.6,62.7 74.9,61 74.9,55.8 65.09,45.99 Q6.G
  Bottom 0.254: Q4.3 75.7,66.7 76.7,65.7 76.7,62.8 v76.6,62.7 75.1,61.2 Q2.3
  Bottom 0.813: Q6.G 61.7,44.19 61.7,42.4 57.7,38.4 39.5,38.4 37.1,40.8 25.09,40.8 Q9.G
N$11
  Bottom 0.152: U$11.SDO U$12.SDI
N$12
  Top 0.254: JP1.3 21.43,6.07 20.5,7 15.5,7 14.5,6 14.5,3.2 16.4,1.3 41.5,1.3 43.45,3.25 U1.16
N$13
  Top 0.254: JP1.2 18.89,3.51 20.5,1.9 40.5,1.9 42.95,4.35 U1.15
N$14
  Top 0.254: U1.9 39.95,3.95 38.5,2.5 31.55,2.5 R1.2 30.69,3.05 JP1.6
N$15
  Bottom 0.254: Q3.1 14.35,55.35 15.9,53.8 R6.2
N$16  (via drill 0.6)
  Top 0.254: v2.2,5.6 2.2,15.52 1.37,16.36 1.37,17.55 2.92,19.1 R4.2
  Bottom 0.254: U$2.SDI 3.6,7 v2.2,5.6
N$17
  Bottom 0.152: U$1.SDO U$3.SDI
N$18  (via drill 0.6)
  Top 0.254: R5.2 29.65,18 3.2,18 v2.2,17
  Bottom 0.254: U$2.CLKI 2.7,11.3 2.2,11.8 v2.2,17
N$19
  Top 0.254: R5.1 34,15.35 U1.49
N$20
  Bottom 0.152: U$1.CLKO U$3.CLKI
N$21
  Top 0.254: R4.1 37.4,18.5 37.95,17.95 U1.44
N$22
  Bottom 0.254: Q4.1 75.15,63.35 74.5,62.7 72.8,62.7 71.9,61.8 71.9,53.55 R7.2
N$23  (via drill 0.6)
  Top 0.254: v25.1,47.6 30.42,42.28 IC3.14
  Bottom 0.254: R3.1 19.15,53.9 R6.1 25.1,47.95 v25.1,47.6
N$24
  Bottom 0.152: U$11.CLKO U$12.CLKI
N$25
  Bottom 0.152: U$12.SDO U$13.SDI
N$26  (via drill 0.6)
  Top 0.254: v26.8,39.1 27.9,40.2 31.3,40.2 32.28,41.18 IC3.13
  Bottom 0.254: R8.1 R7.1 72.3,47.3 57.5,32.5 54.6,32.5 46.9,24.8 35.3,24.8 34.3,25.8 31.1,25.8 arc-61 20.9,31.8 arc-34 20.6,33.2 20.6,35.6 24.1,39.1 v26.8,39.1
N$27
  Bottom 0.152: U$12.CLKO U$13.CLKI
N$28
  Bottom 0.152: U$13.SDO U$14.SDI
N$29
  Bottom 0.152: U$3.SDO U$4.SDI
N$30
  Bottom 0.152: U$3.CLKO U$4.CLKI
N$31
  Bottom 0.152: U$13.CLKO U$14.CLKI
N$32
  Bottom 0.152: U$14.SDO U$15.SDI
N$33
  Bottom 0.152: U$14.CLKO U$15.CLKI
N$34
  Bottom 0.152: U$4.SDO U$5.SDI
N$35
  Bottom 0.152: U$4.CLKO U$5.CLKI
N$36
  Bottom 0.152: U$16.SDI U$15.SDO
N$37
  Bottom 0.152: U$15.CLKO U$16.CLKI
N$38
  Bottom 0.152: U$16.SDO U$17.SDI
N$39
  Bottom 0.152: U$16.CLKO U$17.CLKI
N$40
  Bottom 0.152: U$5.SDO U$6.SDI
N$41
  Bottom 0.152: U$5.CLKO U$6.CLKI
N$42
  Bottom 0.152: U$17.SDO U$18.SDI
N$43
  Bottom 0.152: U$17.CLKO U$18.CLKI
N$44
  Bottom 0.152: U$18.SDO U$19.SDI
N$45
  Bottom 0.152: U$18.CLKO U$19.CLKI
N$46
  Bottom 0.152: U$6.SDO U$7.SDI
N$47
  Bottom 0.813: Q9.D 22.8,45.3 28.3,45.3 30.7,42.9 49.1,42.9 51.5,45.3 54.1,45.3 | 54.1,45.3 57,45.3 Q6.D | 54.1,45.3 JP6.1
N$48
  Bottom 0.152: U$20.SDI U$19.SDO
N$49
  Bottom 0.152: U$19.CLKO U$20.CLKI
N$50
  Top 0.813: Q5.D 57,79.5 51.5,79.5 49.1,81.9 30.6,81.9 28.3,79.6 25.7,79.6 | Q7.D 22.7,79.6 25.7,79.6 | 25.7,79.6 JP5.1
N$51
  Bottom 0.152: U$20.SDO U$21.SDI
N$52
  Bottom 0.152: U$20.CLKO U$21.CLKI
N$53
  Bottom 0.152: U$21.SDO U$22.SDI
N$54
  Bottom 0.152: U$6.CLKO U$7.CLKI
N$55
  Bottom 0.152: U$21.CLKO U$22.CLKI
N$56
  Bottom 0.152: U$23.SDI U$22.SDO
N$57
  Bottom 0.152: U$22.CLKO U$23.CLKI
N$58
  Bottom 0.152: U$23.SDO U$24.SDI
N$59
  Bottom 0.152: U$23.CLKO U$24.CLKI
N$60
  Bottom 0.152: U$7.SDO U$8.SDI
N$61
  Bottom 0.152: U$24.SDO U$25.SDI
N$62
  Bottom 0.152: U$7.CLKO U$8.CLKI
N$63
  Bottom 0.152: U$25.CLKI U$24.CLKO
N$64
  Bottom 0.152: U$25.SDO U$26.SDI
N$65
  Bottom 0.152: U$25.CLKO U$26.CLKI
N$66
  Bottom 0.152: U$8.SDO U$9.SDI
N$67
  Bottom 0.152: U$8.CLKO U$9.CLKI
N$68
  Bottom 0.152: U$27.SDI U$26.SDO
N$69
  Bottom 0.152: U$26.CLKO U$27.CLKI
N$70
  Bottom 0.152: U$9.SDO U$10.SDI
N$71
  Bottom 0.152: U$9.CLKO U$10.CLKI
N$72
  Bottom 0.152: U$27.SDO U$28.SDI
N$73
  Bottom 0.152: U$27.CLKO U$28.CLKI
N$74
  Top 0.254: IC3.1 48.8,41 48.8,26.4 47.6,25.2 34.9,25.2 33.25,26.85 JP4.1
  Bottom 0.254: R9.1 33.25,30.8 JP4.1
N$75
  Bottom 0.152: U$28.SDO U$29.SDI
N$76
  Bottom 0.152: U$28.CLKO U$29.CLKI
N$77
  Bottom 0.152: U$29.SDO U$30.SDI
N$78
  Bottom 0.152: U$29.CLKO U$30.CLKI
N$79
  Bottom 0.152: U$30.SDO U$31.SDI
N$80
  Bottom 0.152: U$30.CLKO U$31.CLKI
N$81
  Bottom 0.152: U$31.SDO U$32.SDI
N$82
  Bottom 0.152: U$31.CLKO U$32.CLKI
N$83
  Bottom 0.152: U$32.SDO U$33.SDI
N$84
  Bottom 0.152: U$33.CLKI U$32.CLKO
N$85
  Bottom 0.152: U$34.SDI U$33.SDO
N$86
  Bottom 0.152: U$33.CLKO U$34.CLKI
N$87
  Bottom 0.152: U$34.SDO U$35.SDI
N$88
  Bottom 0.152: U$35.CLKI U$34.CLKO
N$89
  Bottom 0.152: U$36.SDI U$35.SDO
N$90
  Bottom 0.152: U$35.CLKO U$36.CLKI
N$91
  Bottom 0.152: U$37.SDI U$36.SDO
N$92
  Bottom 0.152: U$36.CLKO U$37.CLKI
N$93
  Bottom 0.152: U$37.SDO U$38.SDI
N$94
  Bottom 0.152: U$37.CLKO U$38.CLKI
N$95
  Top 0.254: IC3.28 47.52,26.82 46.9,26.2 42.4,26.2 40.87,27.73 JP4.4
N$96
  Bottom 0.152: U$38.SDO U$39.SDI
N$97
  Bottom 0.152: U$38.CLKO U$39.CLKI
N$98
  Bottom 0.152: U$40.SDI U$39.SDO
N$99
  Bottom 0.152: U$39.CLKO U$40.CLKI
N$100
  Bottom 0.152: U$40.SDO U$41.SDI
N$101
  Bottom 0.152: U$40.CLKO U$41.CLKI
N$102
  Bottom 0.152: U$42.SDI U$41.SDO
N$103
  Bottom 0.152: U$41.CLKO U$42.CLKI
N$104
  Bottom 0.152: U$43.SDI U$42.SDO
N$105
  Bottom 0.152: U$42.CLKO U$43.CLKI
N$106
  Bottom 0.152: U$44.SDI U$43.SDO
N$107
  Bottom 0.152: U$43.CLKO U$44.CLKI
N$108
  Bottom 0.152: U$45.SDI U$44.SDO
N$109
  Bottom 0.152: U$44.CLKO U$45.CLKI
N$110
  Bottom 0.152: U$46.SDI U$45.SDO
N$111
  Bottom 0.152: U$45.CLKO U$46.CLKI
N$112
  Top 0.254: IC3.27 46.25,31.55 45.6,30.9 44.5,30.9 43.41,29.81 JP4.5
N$113
  Bottom 0.152: U$47.SDI U$46.SDO
N$114
  Bottom 0.152: U$46.CLKO U$47.CLKI
N$115
  Bottom 0.152: U$47.SDO U$48.SDI
N$116
  Bottom 0.152: U$47.CLKO U$48.CLKI
N$117
  Bottom 0.152: U$48.SDO U$49.SDI
N$118
  Bottom 0.152: U$48.CLKO U$49.CLKI
N$119
  Bottom 0.152: U$49.SDO U$50.SDI
N$120
  Bottom 0.152: U$50.CLKI U$49.CLKO
N$121
  Bottom 0.152: U$50.SDO U$51.SDI
N$122
  Bottom 0.152: U$50.CLKO U$51.CLKI
N$123
  Bottom 0.152: U$52.SDI U$51.SDO
N$124
  Bottom 0.152: U$51.CLKO U$52.CLKI
N$125
  Bottom 0.152: U$52.SDO U$53.SDI
N$126
  Bottom 0.152: U$52.CLKO U$53.CLKI
N$127
  Bottom 0.152: U$53.SDO U$54.SDI
N$128
  Bottom 0.152: U$53.CLKO U$54.CLKI
N$129
  Bottom 0.152: U$54.SDO U$55.SDI
N$130
  Bottom 0.152: U$54.CLKO U$55.CLKI
N$131
  Bottom 0.152: U$55.SDO U$56.SDI
N$132
  Bottom 0.152: U$55.CLKO U$56.CLKI
N$133
  Bottom 0.152: U$56.SDO U$57.SDI
N$134
  Bottom 0.152: U$56.CLKO U$57.CLKI
N$135
  Bottom 0.152: U$57.SDO U$58.SDI
N$136
  Bottom 0.152: U$57.CLKO U$58.CLKI
N$137
  Bottom 0.152: U$58.SDO U$59.SDI
N$138
  Bottom 0.152: U$58.CLKO U$59.CLKI
N$139
  Bottom 0.152: U$60.SDI U$59.SDO
N$140
  Bottom 0.152: U$59.CLKO U$60.CLKI
N$141
  Bottom 0.152: U$60.SDO U$61.SDI
N$142
  Bottom 0.152: U$60.CLKO U$61.CLKI
N$143
  Bottom 0.152: U$61.SDO U$62.SDI
N$144
  Bottom 0.152: U$61.CLKO U$62.CLKI
N$145
  Bottom 0.152: U$63.SDI U$62.SDO
N$146
  Bottom 0.152: U$62.CLKO U$63.CLKI
N$147
  Bottom 0.152: U$63.SDO U$64.SDI
N$148
  Bottom 0.152: U$64.CLKI U$63.CLKO
N$149
  Bottom 0.152: U$65.SDI U$64.SDO
N$150
  Bottom 0.152: U$65.CLKI U$64.CLKO
N$151
  Bottom 0.152: U$65.SDO U$66.SDI
N$152
  Bottom 0.152: U$65.CLKO U$66.CLKI
N$153
  Bottom 0.152: U$67.SDI U$66.SDO
N$154
  Bottom 0.152: U$66.CLKO U$67.CLKI
N$155
  Bottom 0.152: U$67.SDO U$68.SDI
N$156
  Bottom 0.152: U$68.CLKI U$67.CLKO
N$157
  Bottom 0.152: U$69.SDI U$68.SDO
N$158
  Bottom 0.152: U$68.CLKO U$69.CLKI
N$159
  Bottom 0.152: U$70.SDI U$69.SDO
N$160
  Bottom 0.152: U$69.CLKO U$70.CLKI
N$161
  Bottom 0.152: U$70.SDO U$71.SDI
N$162
  Bottom 0.152: U$71.CLKI U$70.CLKO
N$163
  Bottom 0.152: U$72.SDI U$71.SDO
N$164
  Bottom 0.152: U$72.CLKI U$71.CLKO
N$165
  Bottom 0.152: U$73.SDI U$72.SDO
N$166
  Bottom 0.152: U$72.CLKO U$73.CLKI
N$167
  Top 0.254: IC3.10 36.09,38.19 35.1,37.2 29.23,37.2 Q8.1
  Bottom 0.254: C10.2 23.9,33.15 Q8.1
N$168
  Top 0.254: Q8.2 28.5,33.4 30.6,35.5 35.6,35.5 37.36,37.26 IC3.9
  Bottom 0.254: C11.2 28.5,32.35 Q8.2
N$169
  Bottom 0.254: Q1.1 16.9,65.15 16.9,56.95 R3.2
N$170
  Bottom 0.254: R8.2 75.15,53.8 Q2.1
N$171  (via drill 0.6)
  Top 0.254: v34.2,38.8 33.55,39.45 IC3.12
  Bottom 0.254: v34.2,38.8 36.9,36.1 57.2,36.1 67.9,46.8 R10.1
N$172
  Bottom 0.254: R10.2 67.9,59.8 T2.1
N$173
  Top 0.406: D6.C 40.4,83.7 34.3,83.7 31,87 L1.1
  Bottom 0.406: IC4.2 40.66,86.6 39.9,86.6 38.5,88 38.5,89.1 37.51,90.09 L1.1
N$174
  Bottom 0.406: T2.2 60.7,62.4
  pour Bottom: 57.9,59.4 57.9,65.4 61.9,65.4 61.9,59.4